# EAGLE board RC2014 - Single Stepper, Revision 2 (EAGLE 7.1.0)
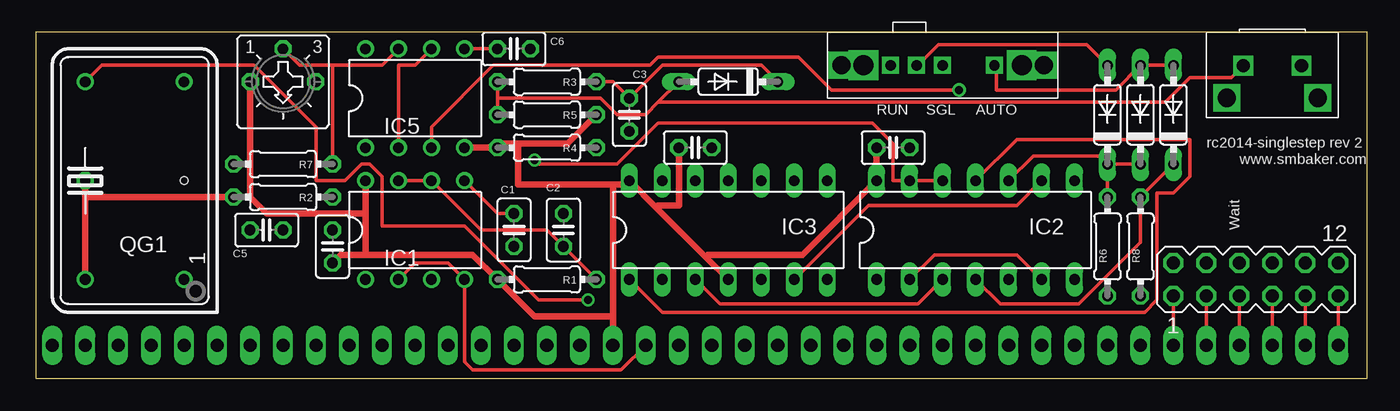
[diagram p0: board, top side]
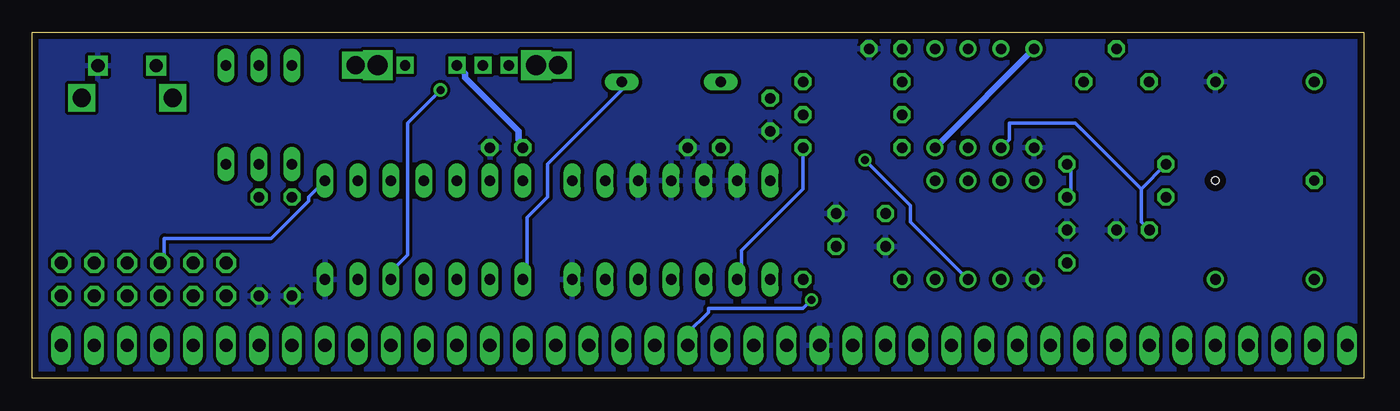
[diagram p1: board, bottom side, seen from below]

Size 102.54 x 26.66 mm. Coordinates in mm from the lower left corner, seen from the top.
Outline: 0,0 102.54,0 102.54,26.66 0,26.66 0,0
Copper layers (1*16): Top 0.035mm / dielectric 1.5mm / Bottom 0.035mm
Design rules "default *": minimum track width 10mil, minimum drill 24mil, track to track 10mil, track to pad 10mil, pad to pad 10mil, via to via 10mil, smd to smd 10mil, copper to edge 20mil, drill to drill 8mil, minimum pad ring 10mil, minimum via ring 8mil, stop-mask expansion 4mil, vias tented up to drill 25mil, thermal gap 10mil
Net classes: 1 pwr: width 0.508 mm
Holes 0.6 mm at 11.43,15.24

## Footprints (pad centres in the part's own frame; a part is rotated, then mirrored left to right if it is on the bottom)
C025-025X050 = drill 0.813 octagon: 1 -1.27,0; 2 1.27,0
DO35-7 = drill 0.813 long: A 3.81,0; C -3.81,0
DIL08 = drill 0.813 pad 1.27: 1 -3.81,-3.81; 2 -1.27,-3.81; 3 1.27,-3.81; 4 3.81,-3.81; 5 3.81,3.81; 6 1.27,3.81; 7 -1.27,3.81; 8 -3.81,3.81
DIL14 = drill 0.813 long: 1 -7.62,-3.81; 2 -5.08,-3.81; 3 -2.54,-3.81; 4 0,-3.81; 5 2.54,-3.81; 6 5.08,-3.81; 7 7.62,-3.81; 8 7.62,3.81; 9 5.08,3.81; 10 2.54,3.81; 11 0,3.81; 12 -2.54,3.81; 13 -5.08,3.81; 14 -7.62,3.81
DIL14S = drill 0.813: 1 -7.62,-3.81; 7 7.62,-3.81; 8 7.62,3.81; 14 -7.62,3.81
0204/7 = drill 0.813 octagon: 1 -3.81,0; 2 3.81,0
CT6 = drill 0.813 octagon: A 2.515,0; E -2.515,0; S 0,-2.54
MA06-2 = drill 1.016 octagon: 1 -6.35,-1.27; 2 -6.35,1.27; 3 -3.81,-1.27; 4 -3.81,1.27; 5 -1.27,-1.27; 6 -1.27,1.27; 7 1.27,-1.27; 8 1.27,1.27; 9 3.81,-1.27; 10 3.81,1.27; 11 6.35,-1.27; 12 6.35,1.27
SIP40 = drill 1.016 long: 1 -48.26,0; 2 -45.72,0; 3 -43.18,0; 4 -40.64,0; 5 -38.1,0; 6 -35.56,0; 7 -33.02,0; 8 -30.48,0; 9 -27.94,0; 10 -25.4,0; 11 -22.86,0; 12 -20.32,0; 13 -17.78,0; 14 -15.24,0; 15 -12.7,0; 16 -10.16,0; 17 -7.62,0; 18 -5.08,0; 19 -2.54,0; 20 0,0; 21 2.54,0; 22 5.08,0; 23 7.62,0; 24 10.16,0; 25 12.7,0; 26 15.24,0; 27 17.78,0; 28 20.32,0; 29 22.86,0; 30 25.4,0; 31 27.94,0; 32 30.48,0; 33 33.02,0; 34 35.56,0; 35 38.1,0; 36 40.64,0; 37 43.18,0; 38 45.72,0; 39 48.26,0; 40 50.8,0
SMALL_TP = drill 0.8 octagon: TP 0,0
3PSLIDE = drill 1.397 square: NC1 -7.798,0; NC4 7.798,0 | drill 1.524 square: NC2 -6.096,0; NC3 6.096,0 | drill 0.8 square: P1 -3.988,0; P2 0,0; P3 2.007,0; P4 4.013,0
BUTTON_RA = drill 1.397 square: NC1 -3.505,1.245; NC2 3.505,1.245 | drill 1.016 square: P$1 -2.248,-1.245; P$2 2.248,-1.245

## Placement (x,y rotation side)
C1  10nf  [C025-025X050]  36.83,11.43 270 top
C2  10nf  [C025-025X050]  40.64,11.43 90 top
C3  [C025-025X050]  45.72,20.32 270 top
C4  [C025-025X050]  66.04,17.78 0 top
C5  1uf  [C025-025X050]  17.78,11.43 0 top
C6  10nf  [C025-025X050]  36.83,25.4 0 top
C7  [C025-025X050]  50.8,17.78 0 top
C8  [C025-025X050]  22.86,10.16 90 top
D1-OPT  1N4148DO35-7  [DO35-7]  53.34,22.86 180 top
D1-OPT1  1N4148  [DO35-7]  82.55,20.32 90 top
D1-OPT2  1N4148  [DO35-7]  85.09,20.32 90 top
D1-OPT3  1N4148  [DO35-7]  87.63,20.32 90 top
IC1  NE555N  [DIL08]  29.21,11.43 0 top
IC2  74AHCT132N  [DIL14]  72.39,11.43 0 top
IC3  74HCT74N  [DIL14]  53.34,11.43 0 top
IC5  NE555N  [DIL08]  29.21,21.59 0 top
QG1  [DIL14S]  7.62,15.24 90 top
R1  10k  [0204/7]  39.37,7.62 180 top
R2  [0204/7]  19.05,13.97 180 top
R3  18K  [0204/7]  39.37,22.86 180 top
R4  10K  [0204/7]  39.37,17.78 180 top
R5  82K  [0204/7]  39.37,20.32 180 top
R6  [0204/7]  82.55,10.16 90 top
R7  10k  [0204/7]  19.05,16.51 180 top
R8  [0204/7]  85.09,10.16 90 top
R9  500K  [CT6]  19.05,22.86 180 top
SV1  [MA06-2]  93.98,7.62 0 top
U$1  RC2014  [SIP40]  49.53,2.54 0 top
U$2  SMALL_TP  [SMALL_TP]  3.81,15.24 0 top
U$3  SWITCH_SLIDE_SP3T  [3PSLIDE]  69.85,24.13 180 top
U$4  BUTTON_RA  [BUTTON_RA]  95.25,22.86 180 top

## Library data of the parts
C1-C8 R1-R8 = resistor
D1-OPT D1-OPT1-D1-OPT3 = diode
IC1 IC5 = linear
IC2 IC3 = 74xx-eu
QG1 = crystal; OC_FARNELL: unknown; OC_NEWARK: unknown
R9 = pot
SV1 = con-lstb; OC_FARNELL: unknown; OC_NEWARK: unknown
U$1-U$4 = scott

## Nets
+5V [pwr]: C4.1 C7.1 C8.1 IC1.8 IC2.14 IC3.4 IC3.14 IC5.4 IC5.8 QG1.14 R1.2 R2.2 R4.2 R5.1 R9.A U$1.18 U$2.TP U$3.P2
CLK: QG1.8 U$1.21
ENABLE_AUTOSTEP: D1-OPT3.C IC2.4 R8.2
ENABLE_STEP: D1-OPT1.C D1-OPT2.C IC2.10 R6.2
GND [pwr]: C1.2 C2.2 C3.2 C4.2 C5.2 C6.2 C7.2 C8.2 IC1.1 IC2.7 IC3.7 IC3.10 IC3.11 IC3.12 IC3.13 IC5.1 QG1.7 R6.1 R8.1 U$1.17 U$4.P$1
M1: IC1.2 IC1.4 U$1.19
N$1: C1.1 IC1.5
N$2: IC5.7 R2.1 R7.1 R9.S
N$3: D1-OPT.A R3.2 R5.2 U$4.P$2
N$4: C2.1 IC1.6 IC1.7 R1.1
N$5: C5.1 IC5.2 IC5.6 R7.2
N$6: IC1.3 IC2.12 IC2.13
N$7: C6.1 IC5.5
N$8: C3.1 D1-OPT.C IC2.1 R3.1
N$9: IC2.3 IC3.3
N$11: SV1.11 U$1.40
N$12: IC2.5 IC5.3
N$13: IC3.2 R4.1
N$14: IC2.11 IC3.1
N$15: IC2.2 IC2.6
N$16: IC2.9 IC3.6
N$17: SV1.9 U$1.39
N$18: SV1.7 U$1.38
N$19: SV1.5 U$1.37
N$20: SV1.3 U$1.36
N$21: SV1.1 U$1.35
N$22: D1-OPT1.A U$3.P3
N$23: D1-OPT2.A D1-OPT3.A U$3.P1
WAIT: IC2.8 SV1.6

## Tracks (layer width: path | path; a pad name or v marks a point on that pad's centre or on a via)
+5V
  Top 0.508: QG1.14 3.81,13.97 | 3.81,13.97 U$2.TP | 3.81,13.97 R2.2 16.51,13.97 | 16.51,13.97 16.51,22.86 R9.A | IC5.4 R4.2 35.88,18.1 37.15,18.1 | R5.1 40.96,18.1 37.15,18.1 | 25.4,9.53 23.5,9.53 C8.1 | 25.4,9.53 33.66,9.53 R1.2 38.42,4.76 44.45,4.76 | 25.4,9.53 25.4,12.7 | 25.4,12.7 IC1.8 | C4.1 IC2.14 59.05,9.53 51.75,9.53 51.59,9.37 | 47.78,13.18 IC3.14 45.72,14.92 44.45,14.92 | 47.78,13.18 51.59,9.37 | 51.59,9.37 IC3.4 | C7.1 49.53,13.34 47.94,13.34 47.78,13.18 | 44.45,14.92 44.45,4.76 | 44.45,4.76 U$1.18 | 37.15,18.1 37.15,14.92 44.45,14.92 | 16.51,13.97 17.78,12.7 25.4,12.7
  Bottom 0.508: IC5.8 32.7,18.1 33.02,18.1 IC5.4 | U$3.P2 69.22,23.5 69.22,23.18 65.09,19.05 65.09,18.41 64.77,18.1 C4.1
CLK  (via drill 0.61)
  Top 0.254: QG1.8 5.08,24.13 16.83,24.13 21.59,19.37 21.59,15.24 23.81,15.24 25.08,16.51 25.72,16.51 26.67,15.56 26.67,11.75 33.02,11.75 38.73,6.03 v42.55,6.03
  Bottom 0.254: v42.55,6.03 43.18,5.4 50.48,5.4 50.48,5.08 52.07,3.49 U$1.21
ENABLE_AUTOSTEP
  Top 0.254: IC2.4 74.3,5.71 80.33,5.71 85.09,10.48 R8.2 D1-OPT3.C
ENABLE_STEP
  Top 0.254: IC2.10 76.83,17.14 81.92,17.14 D1-OPT1.C | D1-OPT1.C R6.2 | D1-OPT1.C D1-OPT2.C
GND
  pour Bottom: 0,0 0,26.67 101.6,26.67 102.87,26.67 102.87,0
M1
  Top 0.254: IC1.2 29.21,8.89 31.75,8.89 IC1.4 33.02,1.27 33.66,0.64 45.09,0.64 U$1.19
N$1
  Top 0.254: IC1.5 35.56,12.7 C1.1
N$2
  Top 0.254: R9.S 20.32,24.13 22.86,24.13 | 22.86,24.13 26.67,24.13 IC5.7 | 22.86,24.13 R7.1
  Bottom 0.254: R2.1 22.54,14.29 22.54,16.19 R7.1
N$3
  Top 0.254: R3.2 35.56,21.59 | 35.56,21.59 R5.2 | 47.94,21.27 46.99,20.32 44.77,20.32 43.5,21.59 35.56,21.59 | 47.94,21.27 D1-OPT.A | U$4.P$2 92.08,23.18 88.9,23.18 87,21.27 47.94,21.27
N$4
  Top 0.254: IC1.7 IC1.6 34.29,11.43 39.37,11.43 C2.1 R1.1
N$5
  Top 0.254: IC5.2 27.94,24.13 29.21,24.13 IC5.6
  Bottom 0.254: C5.1 17.14,12.06 17.14,14.61 | R7.2 17.14,14.61 | 17.14,14.61 22.23,19.68 27.3,19.68 27.3,18.41 IC5.2
N$6  (via drill 0.61)
  Top 0.254: v38.42,16.83 38.73,16.51 44.77,16.51 47.94,19.68 64.45,19.68 66.04,18.1 66.04,15.24 IC2.13 IC2.12
  Bottom 0.254: IC1.3 34.92,12.06 34.92,13.34 v38.42,16.83
N$7
  Top 0.254: C6.1 IC5.5
N$8
  Top 0.254: R3.1 44.45,22.86 C3.1 48.26,24.13 55.88,24.13 D1-OPT.C
  Bottom 0.254: IC2.1 64.45,7.94 64.45,12.38 62.87,13.97 62.87,16.51 57.15,22.23 D1-OPT.C
N$9
  Top 0.254: IC3.3 52.7,5.71 67.94,5.71 IC2.3
N$11
  Top 0.254: SV1.11 U$1.40
N$12  (via drill 0.61)
  Top 0.254: IC5.3 30.48,19.37 35.24,24.13 47.31,24.13 47.94,24.77 58.74,24.77 61.28,22.23 v71.12,22.23
  Bottom 0.254: v71.12,22.23 73.66,19.68 73.66,9.53 74.93,8.26 IC2.5
N$13
  Bottom 0.254: IC3.2 47.94,7.94 47.94,9.84 43.18,14.61 R4.1
N$14
  Top 0.254: IC3.1 48.26,5.08 85.41,5.08 86.36,6.03 86.36,14.29 87.63,14.29 88.9,15.56 88.9,18.41 75.56,18.41 IC2.11
N$15
  Top 0.254: IC2.2 69.22,9.53 75.56,9.53 IC2.6
N$16
  Top 0.254: IC3.6 64.14,13.34 75.56,13.34 IC2.9
N$17
  Top 0.254: SV1.9 U$1.39
N$18
  Top 0.254: SV1.7 U$1.38
N$19
  Top 0.254: SV1.5 U$1.37
N$20
  Top 0.254: SV1.3 U$1.36
N$21
  Top 0.254: SV1.1 U$1.35
N$22
  Top 0.254: D1-OPT1.A 80.96,25.72 69.53,25.72 67.94,24.13 U$3.P3
N$23
  Top 0.254: U$3.P1 73.98,24.13 73.98,22.23 83.19,22.23 D1-OPT2.A D1-OPT3.A
WAIT
  Bottom 0.254: IC2.8 81.28,13.97 81.28,13.65 84.14,10.79 92.39,10.79 92.39,9.21 SV1.6

## Text on the board
tPlace: RUN | SGL | AUTO | rc2014-singlestep rev 2 | www.smbaker.com | Wait